# Allegro board ATMEGA.brd
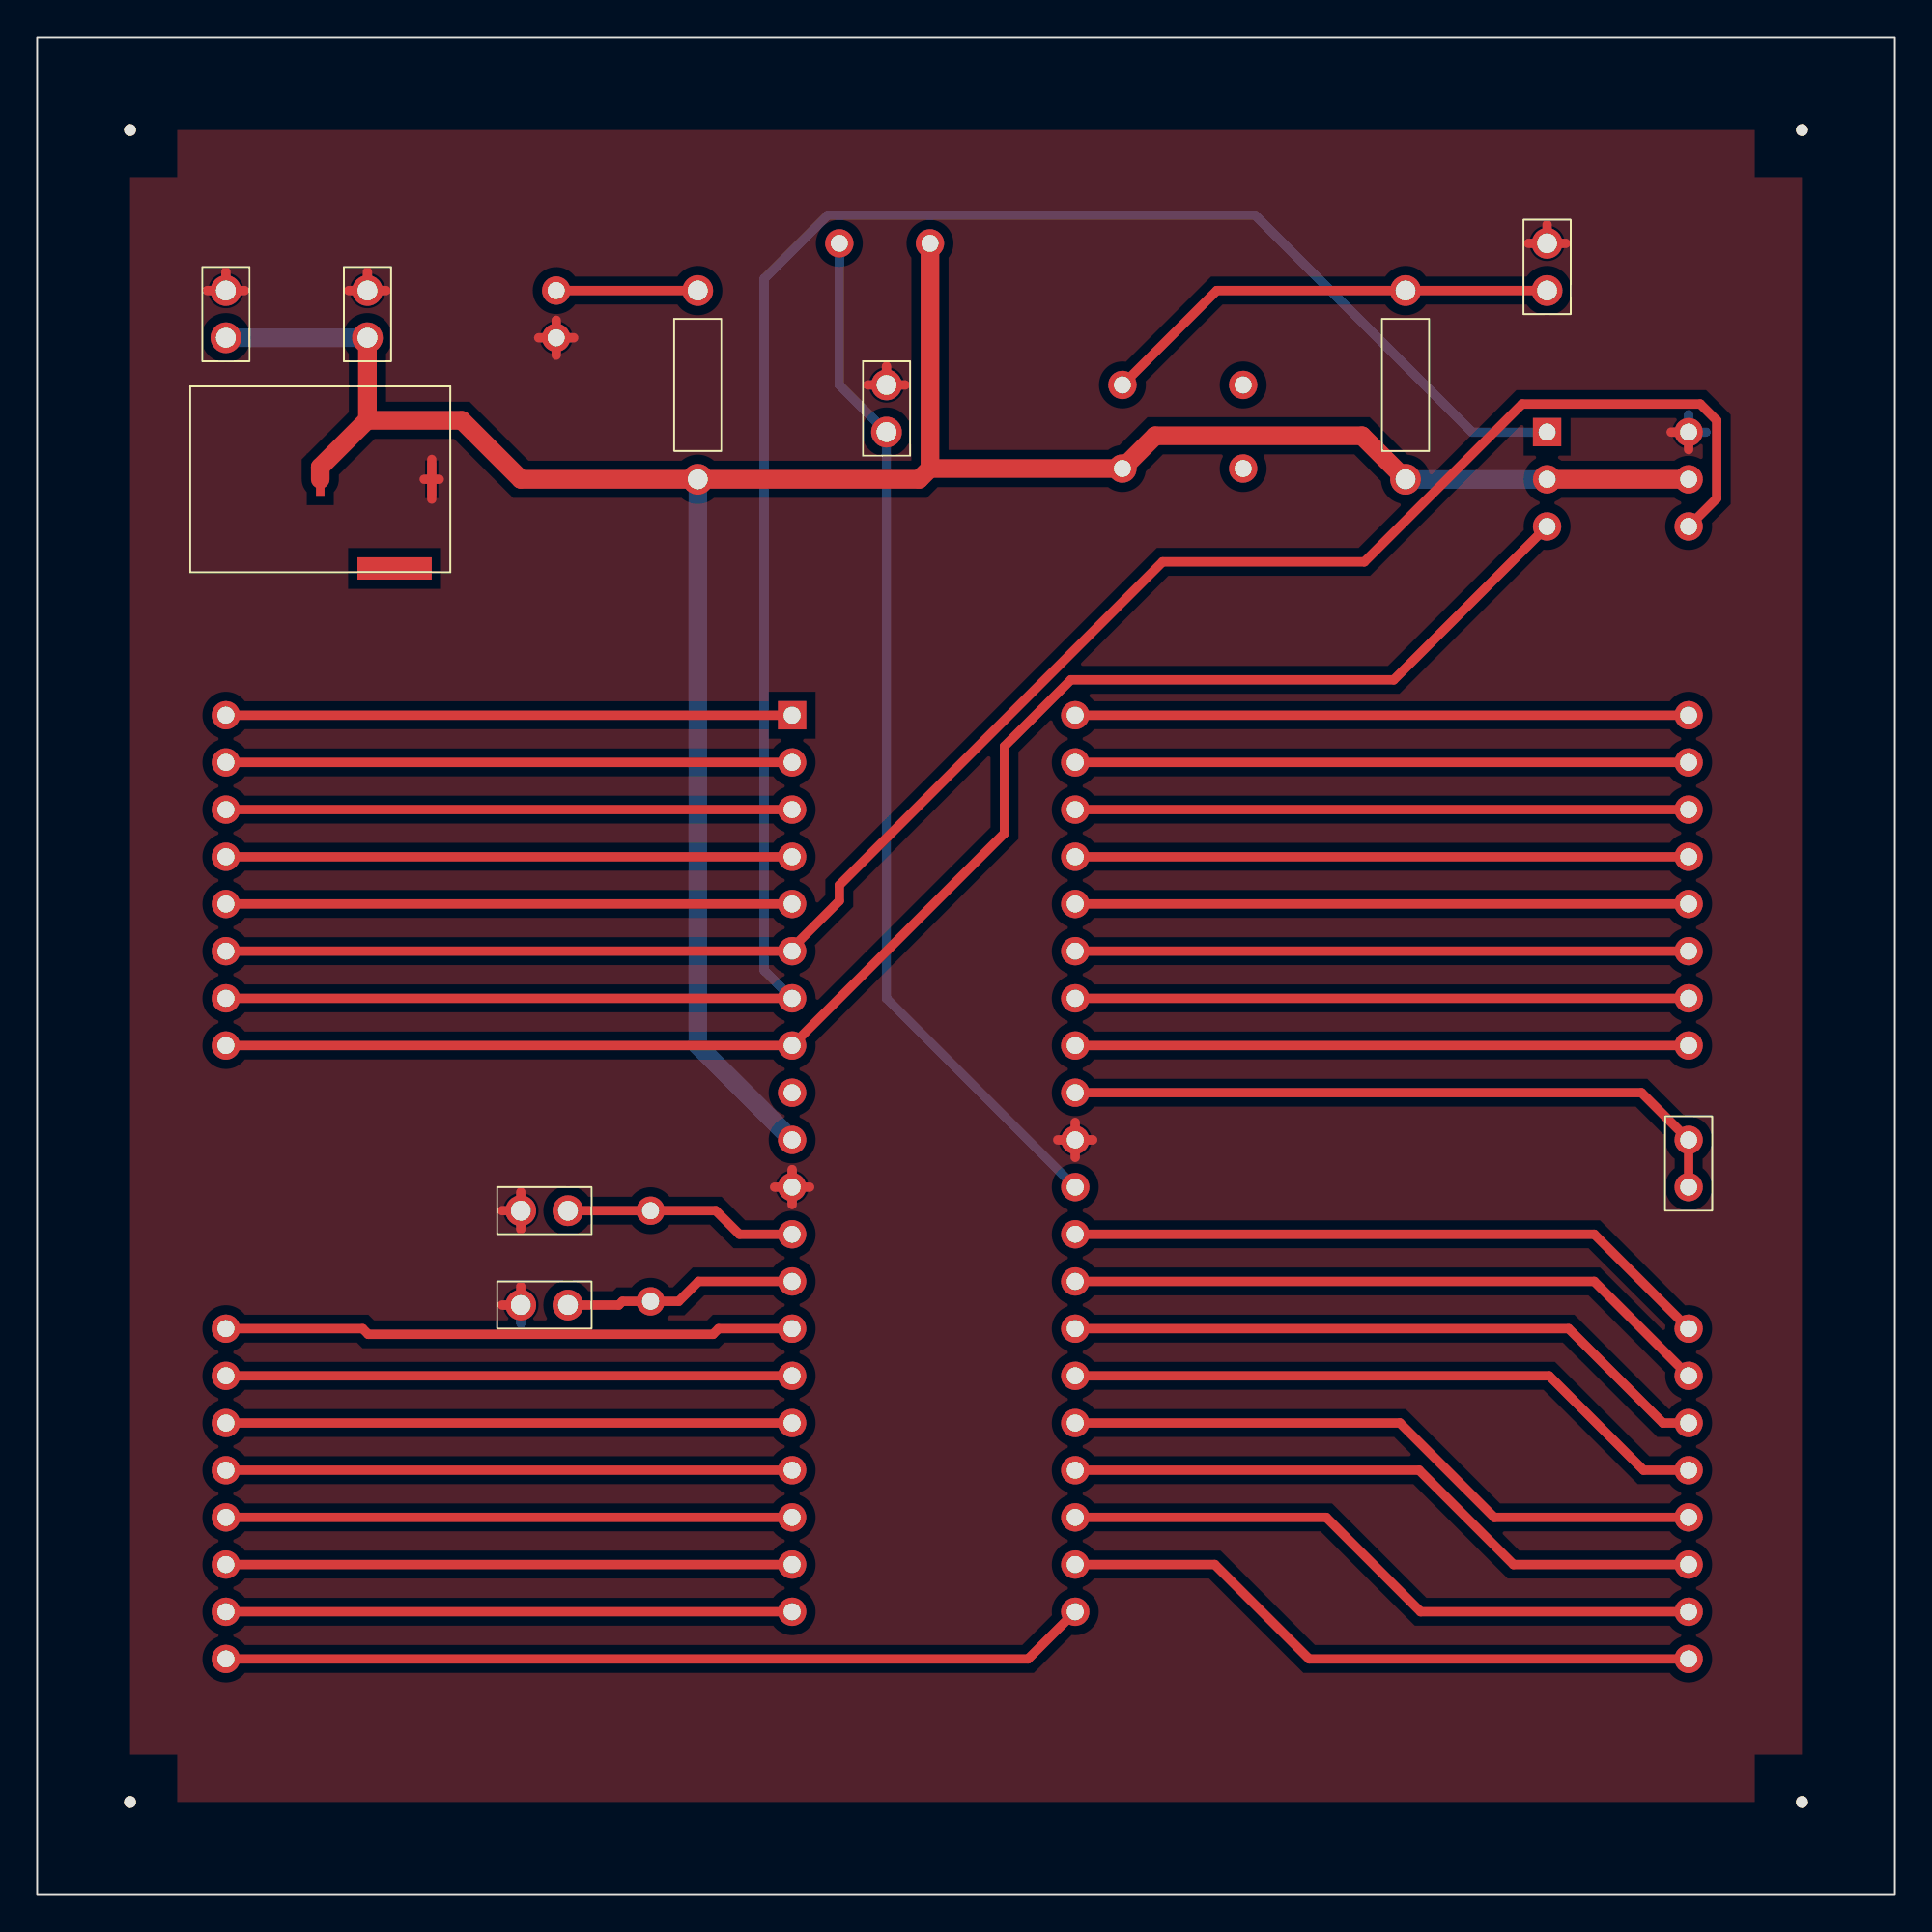
[diagram p0: board, top side]
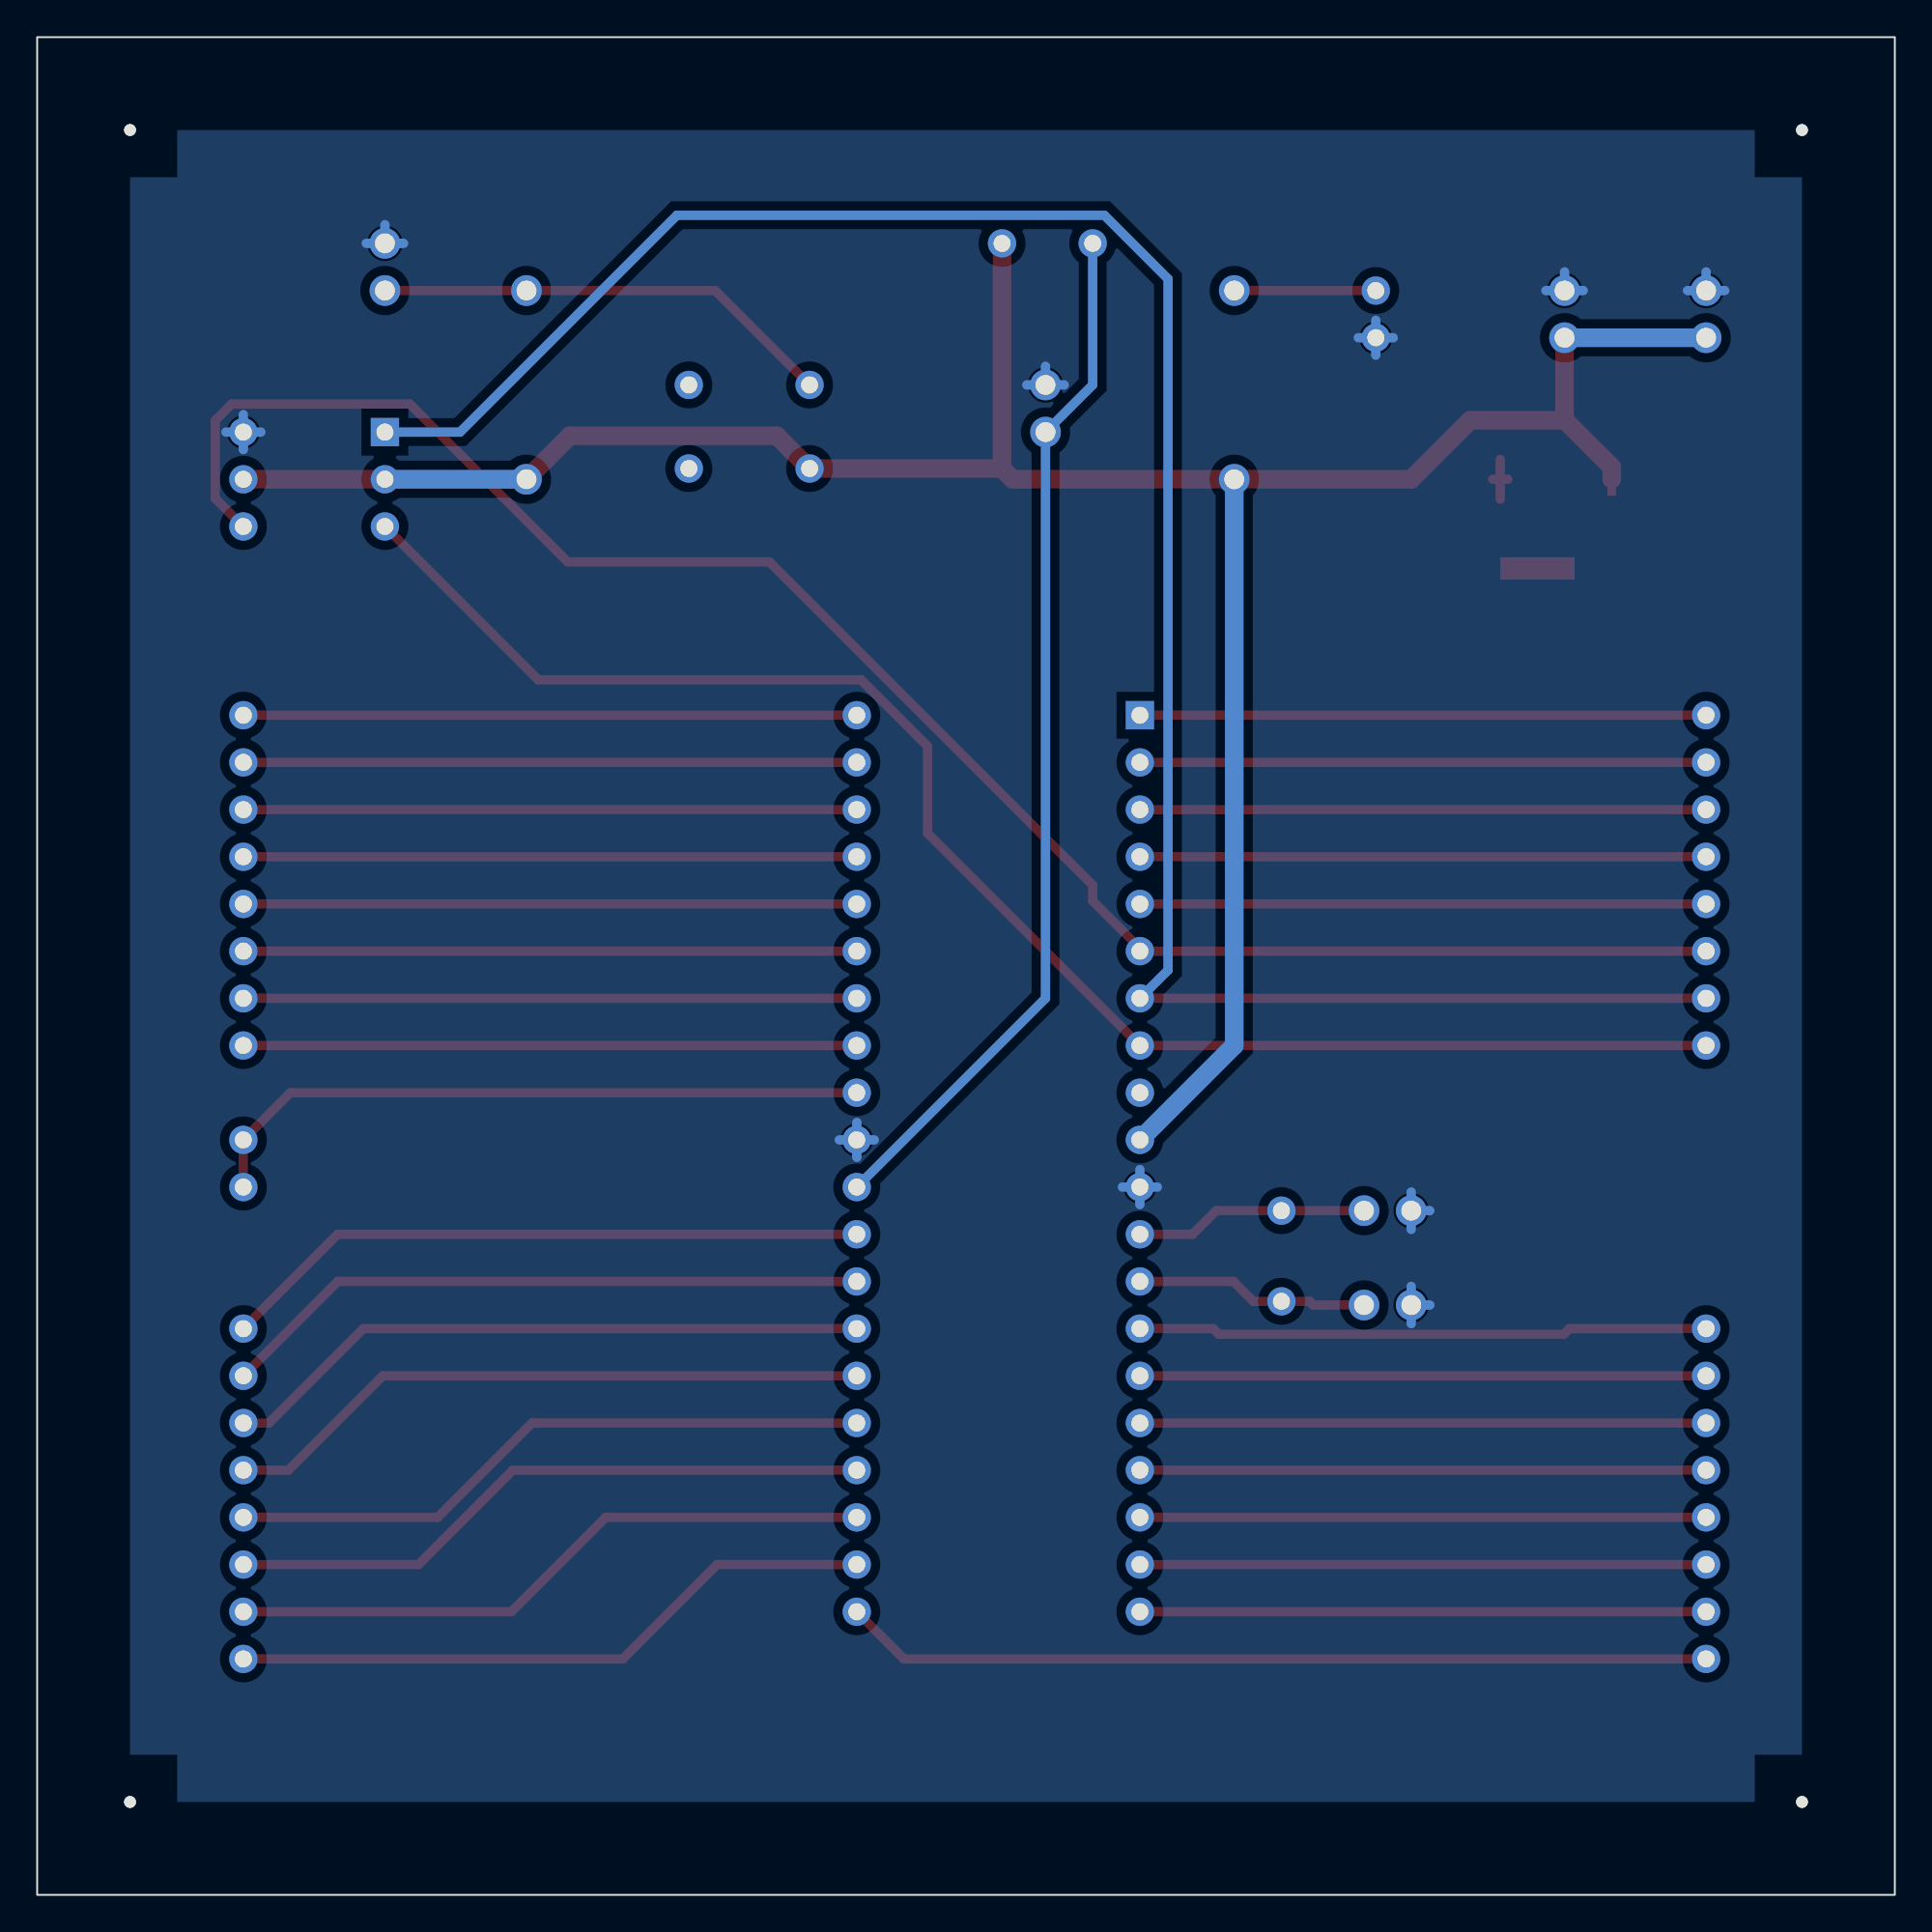
[diagram p1: board, bottom side, seen from below]

Outline 100 x 100 mm; copper layers: TOP, BOTTOM. Coordinates in mm from the lower left corner of the outline.
Outline path: rectangle 0,0 100,100

## Design rules (mm)
nets with their own width: min track width 1; nets GND N01864

## Placement (name value [footprint] x y rotation side)
C1  5  [CAPCK05]  10.16 83.82 0 top
C2  5  [CAPCK05]  17.78 83.82 0 top
C3  100n  [CAPCK05]  45.72 78.74 0 top
C4  5  [CAPCK05]  26.04 36.83 270 top
C5  5  [CAPCK05]  26.04 31.75 270 top
C6  100n  [CAPCK05]  81.28 86.36 0 top
D1  LED  [CAP196]  27.94 83.82 0 top
J1  CON3  [DCJACK]  15.24 76.2 0 top
J2  CON8  [MYCON8]  10.16 45.72 180 top
J3  CON8  [MYCON8]  88.9 45.72 180 top
J4  CON6  [DIP6_3]  81.28 78.74 0 top
J5  CON8  [MYCON8]  88.9 12.7 180 top
J6  CON8  [MYCON8]  10.16 30.48 0 top
J7  CON2  [JUMPER2]  88.9 40.64 270 top
L1  10u  [CRYSTAL]  43.18 88.9 0 top
NOREF  -  [unnamed]  5 5 0 top
NOREF#2  -  [#2]  0 0 90 top
NOREF#3  -  [unnamed]  95 95 0 top
NOREF#4  -  [unnamed]  5 95 0 top
NOREF#5  -  [#2]  0 100 0 top
NOREF#6  -  [unnamed]  95 5 0 top
R1  1k  [RES400]  35.56 76.2 0 top
R2  10K  [RES400]  73.66 76.2 0 top
SW1  SW PUSHBUTTON-SPST-2  [TACK_SWITCH]  58.42 81.28 0 top
U1  ATMEGA16  [DIP40_6]  40.64 63.5 0 top
Y1  -  [CRYSTAL]  33.02 36.83 270 top

## Library data of the parts
C1 = CAP: Tolerance: ***; User Part Number: ***
C2-C6 = CAP NP: Tolerance: ***; User Part Number: ***
D1 = LED: Tolerance: ***; User Part Number: ***
J1 = CON3
J2 J3 J5 J6 = CON8
J4 = CON6_1: Tolerance: ***; User Part Number: ***
J7 = CON2: User Part Number: ***
L1 = INDUCTOR
R1 R2 = R: Tolerance: ***; User Part Number: ***
SW1 = SW PUSHBUTTON-SPST-2
U1 = atmega16_3: Tolerance: ***; User Part Number: ***
Y1 = CRYSTAL

## Footprints (pads in the part's own frame, mm; a bottom-side part is the same pattern mirrored in y, then rotated)
CAP196
  round 1.524 hole 0.914: 1(0,0) 2(0,2.54)
CAPCK05
  round 1.651 hole 1.067: 1(0,0) 2(0,2.54)
CRYSTAL
  round 1.524 hole 0.914: 1(0,0) 2(4.88,0)
DCJACK
  rect 0.457x1.778 smd: 1(0,0) 3(6,0)
  rect 4x1.2 smd: 2(4,-4.8)
DIP6_3
  rect 1.524x1.524 hole 0.914: 1(0,0)
  round 1.524 hole 0.914: 2(0,-2.54) 3(0,-5.08) 4(7.62,-5.08) 5(7.62,-2.54) 6(7.62,0)
DIP40_6
  rect 1.524x1.524 hole 0.914: 1(0,0)
  round 1.524 hole 0.914: 2(0,-2.54) 3(0,-5.08) 4(0,-7.62) 5(0,-10.16) 6(0,-12.7) 7(0,-15.24) 8(0,-17.78) 9(0,-20.32) 10(0,-22.86) 11(0,-25.4) 12(0,-27.94) 13(0,-30.48) 14(0,-33.02) 15(0,-35.56) 16(0,-38.1) 17(0,-40.64) 18(0,-43.18) 19(0,-45.72) 20(0,-48.26) 21(15.24,-48.26) 22(15.24,-45.72) 23(15.24,-43.18) 24(15.24,-40.64) 25(15.24,-38.1) 26(15.24,-35.56) 27(15.24,-33.02) 28(15.24,-30.48) 29(15.24,-27.94) 30(15.24,-25.4) 31(15.24,-22.86) 32(15.24,-20.32) 33(15.24,-17.78) 34(15.24,-15.24) 35(15.24,-12.7) 36(15.24,-10.16) 37(15.24,-7.62) 38(15.24,-5.08) 39(15.24,-2.54) 40(15.24,0)
JUMPER2
  round 1.524 hole 0.914: 1(0,0) 2(2.54,0)
MYCON8
  round 1.524 hole 0.914: 1(0,0) 2(0,-2.54) 3(0,-5.08) 4(0,-7.62) 5(0,-10.16) 6(0,-12.7) 7(0,-15.24) 8(0,-17.78)
RES400
  round 1.651 hole 1.067: 1(0,0) 2(0,10.16)
TACK_SWITCH
  round 1.524 hole 0.914: 1(0,-4.5) 2(6.5,-4.5) 3(6.5,0) 4(0,0)
unnamed
  round 0.635 hole 3.175 unplated: (0,0)

## Nets
GND: C1.2 C2.2 C3.2 C4.1 C5.1 C6.2 D1.1(CATHODE) J1.3 J4.6(GROUND) U1.11(GND2) U1.31(GND)
N00396: J2.8 U1.1(PB0 (XCK/T0))
N00400: J2.7 U1.2(PB1)
N00404: J2.6 U1.3(PB2)
N00408: J2.5 U1.4(PB3)
N00412: J2.4 U1.5(PB4)
N00416: J2.3 J4.4(MOSI) U1.6(PB5)
N00420: J2.2 J4.1((MISO)) U1.7(PB6)
N00424: J2.1 J4.3(3(SCK)) U1.8(PB7)
N00456: J6.8 U1.21(PD7 (OC2))
N00481: J3.8 U1.40(PA0 (ADC0))
N00485: J3.7 U1.39(PA1 (ADC10)
N00489: J3.6 U1.38(PA2 (ADC2))
N00493: J3.5 U1.37(PA3 (ADC3))
N00497: J3.4 U1.36(PA4 (ADC4))
N00501: J3.3 U1.35(PA5 (ADC5))
N00505: J3.2 U1.34(PA6 (ADC6))
N00509: J3.1 U1.33(PA7 (ADC7))
N00513: J5.1 U1.22(PC0 (SCL))
N00517: J5.2 U1.23(PC1 (SDA))
N00521: J5.3 U1.24(PC2 (TCK))
N00525: J5.4 U1.25(PC3 (TMS))
N00529: J5.5 U1.26(PC4 (TDO))
N00533: J5.6 U1.27(PC5 (TDI))
N00537: J5.7 U1.28(PC6 (TOSC1))
N00541: J5.8 U1.29(PC7 (TOSC2))
N00560: J7.1 J7.2 U1.32(AREF)
N00702: C3.1 L1.1 U1.30(AVCC)
N01864: C1.1 C2.1 J1.1 J4.2(VCC) J4.5(RESET) L1.2 R1.1 R2.1 SW1.1 U1.10(VCC)
N02538: C6.1 R2.2 SW1.4
N05138: C4.2 U1.12(XTAL2) Y1.1
N09735: C5.2 U1.13(XTAL1) Y1.2
N09981: J6.1 U1.14(PD0 (RXD))
N09988: J6.2 U1.15(PD1 (TXD))
N10000: J6.3 U1.16(PD2 (INT0))
N10012: J6.4 U1.17(PD3 (INT1))
N10024: J6.5 U1.18(PD4 (OC1B))
N10036: J6.6 U1.19(PD5 (OC1A))
N10048: J6.7 U1.20(PD6 (ICP1))
N10274: D1.2(ANODE) R1.2

Pads without a net: J1 2; SW1 2 3; U1 9

## Routing (per net, layer and track width the routed paths; a pad name or vN(x,y) marks a point on that pad's centre or on a via; arc(x,y) is an arc through that point)
GND: length 66.3
  TOP w0.5: C4.1 26.04,37.83 ; C4.1 26.04,35.83 ; C4.1 25.03,36.83 ; J1.3 21.24,77.27 ; J1.3 20.83,76.2 ; J1.3 21.65,76.2 ; J1.3 21.24,75.13 ; U1.11 41.58,38.1 ; U1.11 40.64,37.16 ; U1.11 40.64,39.04 ; U1.11 39.7,38.1 ; 87.96,78.74 J4.6 88.9,77.8 ; C2.2 18.78,86.36 ; C2.2 17.78,87.36 ; C2.2 16.78,86.36 ; D1.1 27.94,84.76 ; D1.1 27.94,82.88 ; D1.1 28.88,83.82 ; D1.1 27,83.82 ; C1.2 10.16,87.36 ; C1.2 9.16,86.36 ; C1.2 11.16,86.36 ; 26.04,32.75 C5.1 25.03,31.75 ; C6.2 82.28,88.9 ; C6.2 80.28,88.9 ; C6.2 81.28,89.9 ; 44.72,81.28 C3.2 ; C3.2 45.72,82.28 ; C3.2 46.72,81.28 ; 55.88,39.7 U1.31 ; U1.31 54.94,40.64 ; U1.31 55.88,41.58 ; U1.31 56.82,40.64
  BOTTOM w0.5: C4.1 26.04,37.83 ; C4.1 25.03,36.83 ; C4.1 26.04,35.83 ; C3.2 45.72,82.28 ; C3.2 46.72,81.28 ; C3.2 44.72,81.28 ; C5.1 26.04,32.75 ; C5.1 26.04,30.75 ; C5.1 25.03,31.75 ; C2.2 18.78,86.36 ; C2.2 16.78,86.36 ; C2.2 17.78,87.36 ; J4.6 89.84,78.74 ; J4.6 88.9,79.68 ; J4.6 88.9,77.8 ; J4.6 87.96,78.74 ; U1.31 56.82,40.64 ; U1.31 55.88,41.58 ; U1.31 55.88,39.7 ; U1.31 54.94,40.64 ; 27,83.82 D1.1 ; D1.1 28.88,83.82 ; D1.1 27.94,84.76 ; D1.1 27.94,82.88 ; 39.7,38.1 U1.11 ; U1.11 40.64,39.04 ; U1.11 40.64,37.16 ; U1.11 41.58,38.1 ; C1.2 11.16,86.36 ; C1.2 9.16,86.36 ; C1.2 10.16,87.36 ; C6.2 82.28,88.9 ; C6.2 80.28,88.9 ; C6.2 81.28,89.9
N00396: length 30.5
  TOP w0.5: J2.8 U1.1
N00400: length 30.5
  TOP w0.5: J2.7 U1.2
N00404: length 30.5
  TOP w0.5: J2.6 U1.3
N00408: length 30.5
  TOP w0.5: J2.5 U1.4
N00412: length 30.5
  TOP w0.5: J2.4 U1.5
N00416: length 100.3
  TOP w0.5: J4.4 90.41,75.17 90.41,79.37 89.53,80.25 79.94,80.25 71.44,71.75 60.58,71.75 43.18,54.35 43.18,53.5 40.76,51.08 40.64,51.08 40.36,50.8 ; 41.04,50.8 U1.6 40.36,50.8 ; 40.36,50.8 J2.3
N00420: length 118.2
  TOP w0.5: J2.2 U1.7
  BOTTOM w0.5: J4.1 77.24,78.74 65.56,90.41 42.55,90.41 39.13,86.99 39.13,49.77 U1.7
N00424: length 85.4
  TOP w0.5: J4.3 73.03,65.41 55.65,65.41 52.07,61.83 52.07,57.15 U1.8 J2.1
N00456: length 46.8
  TOP w0.5: U1.21 53.34,12.7 J6.8
N00481: length 33
  TOP w0.5: J3.8 U1.40
N00485: length 33
  TOP w0.5: J3.7 U1.39
N00489: length 33
  TOP w0.5: J3.6 U1.38
N00493: length 33
  TOP w0.5: J3.5 U1.37
N00497: length 33
  TOP w0.5: J3.4 U1.36
N00501: length 33
  TOP w0.5: J3.3 U1.35
N00505: length 33
  TOP w0.5: J3.2 U1.34
N00509: length 33
  TOP w0.5: J3.1 U1.33
N00513: length 35.1
  TOP w0.5: J5.1 68.47,12.7 63.39,17.78 U1.22
N00517: length 35.1
  TOP w0.5: U1.23 69.39,20.32 74.47,15.24 J5.2
N00521: length 35.1
  TOP w0.5: J5.3 79.47,17.78 74.39,22.86 U1.24
N00525: length 35.1
  TOP w0.5: J5.4 78.44,20.32 73.36,25.4 U1.25
N00529: length 35.1
  TOP w0.5: J5.5 86.47,22.86 81.39,27.94 U1.26
N00533: length 35.1
  TOP w0.5: U1.27 82.44,30.48 87.52,25.4 J5.6
N00537: length 35.1
  TOP w0.5: J5.7 83.82,33.02 U1.28
N00541: length 35.1
  TOP w0.5: U1.29 83.82,35.56 J5.8
N00560: length 36.6
  TOP w0.5: U1.32 86.36,43.18 J7.1 J7.2
N00702: length 56.1
  BOTTOM w0.5: U1.30 45.72,48.26 C3.1 43.18,81.28 L1.1
N01864: length 140.5
  TOP w1: C2.1 17.78,79.4 ; 17.78,79.4 17.81,79.38 22.86,79.38 26.04,76.2 R1.1 47.48,76.2 48.06,76.78 ; 17.78,79.4 15.24,76.86 J1.1 ; 48.06,76.78 L1.2 ; 48.06,76.78 SW1.1 60.18,78.54 71.32,78.54 R2.1 ; J4.5 J4.2
  BOTTOM w1: U1.10 35.56,45.72 R1.1 ; C1.1 C2.1 ; R2.1 J4.2
N02538: length 25
  TOP w0.5: SW1.4 63.5,86.36 R2.2 C6.1
N05138: length 12.6
  TOP w0.5: C4.2 Y1.1 36.53,36.83 37.8,35.56 U1.12
N09735: length 12.6
  TOP w0.5: U1.13 35.6,33.02 34.53,31.95 Y1.2 31.51,31.95 31.31,31.75 C5.2
N09981: length 30.7
  TOP w0.5: U1.14 36.68,30.48 36.38,30.17 17.82,30.17 17.52,30.48 J6.1
N09988: length 30.5
  TOP w0.5: J6.2 U1.15
N10000: length 30.5
  TOP w0.5: J6.3 U1.16
N10012: length 30.5
  TOP w0.5: J6.4 U1.17
N10024: length 30.5
  TOP w0.5: J6.5 U1.18
N10036: length 30.5
  TOP w0.5: J6.6 U1.19
N10048: length 30.5
  TOP w0.5: J6.7 U1.20
N10274: length 7.6
  TOP w0.5: R1.2 D1.2

## Copper pours and planes (outline as drawn; the poured copper is in the pictures)
GND on TOP, BOTTOM: 5,5 5,95 95,95 95,5

## Text on the board
DIMENSION: FIGURE | SIZE | 0.9144 | 1.0668 | 3.175 | DRILL CHART: TOP to BOTTOM | ALL UNITS ARE IN MILLIMETERS | PLATED | NON-PLATED | QTY | 92 | 16 | 4
